# Altium PCB PCB1 - kopia.PcbDoc
Units mm, origin at the board's own origin, x right, y up, seen from the top; angles counter-clockwise.
Board outline 99.6 x 99.6 mm, 4 copper layers (Top Layer, Int1 (GND), Int2 (PWR), Bottom Layer), stack 1.369 mm thick; 74 components, 60 nets, 286 pads, 140 vias.
Unrouted connection lines stored in the file: 52.
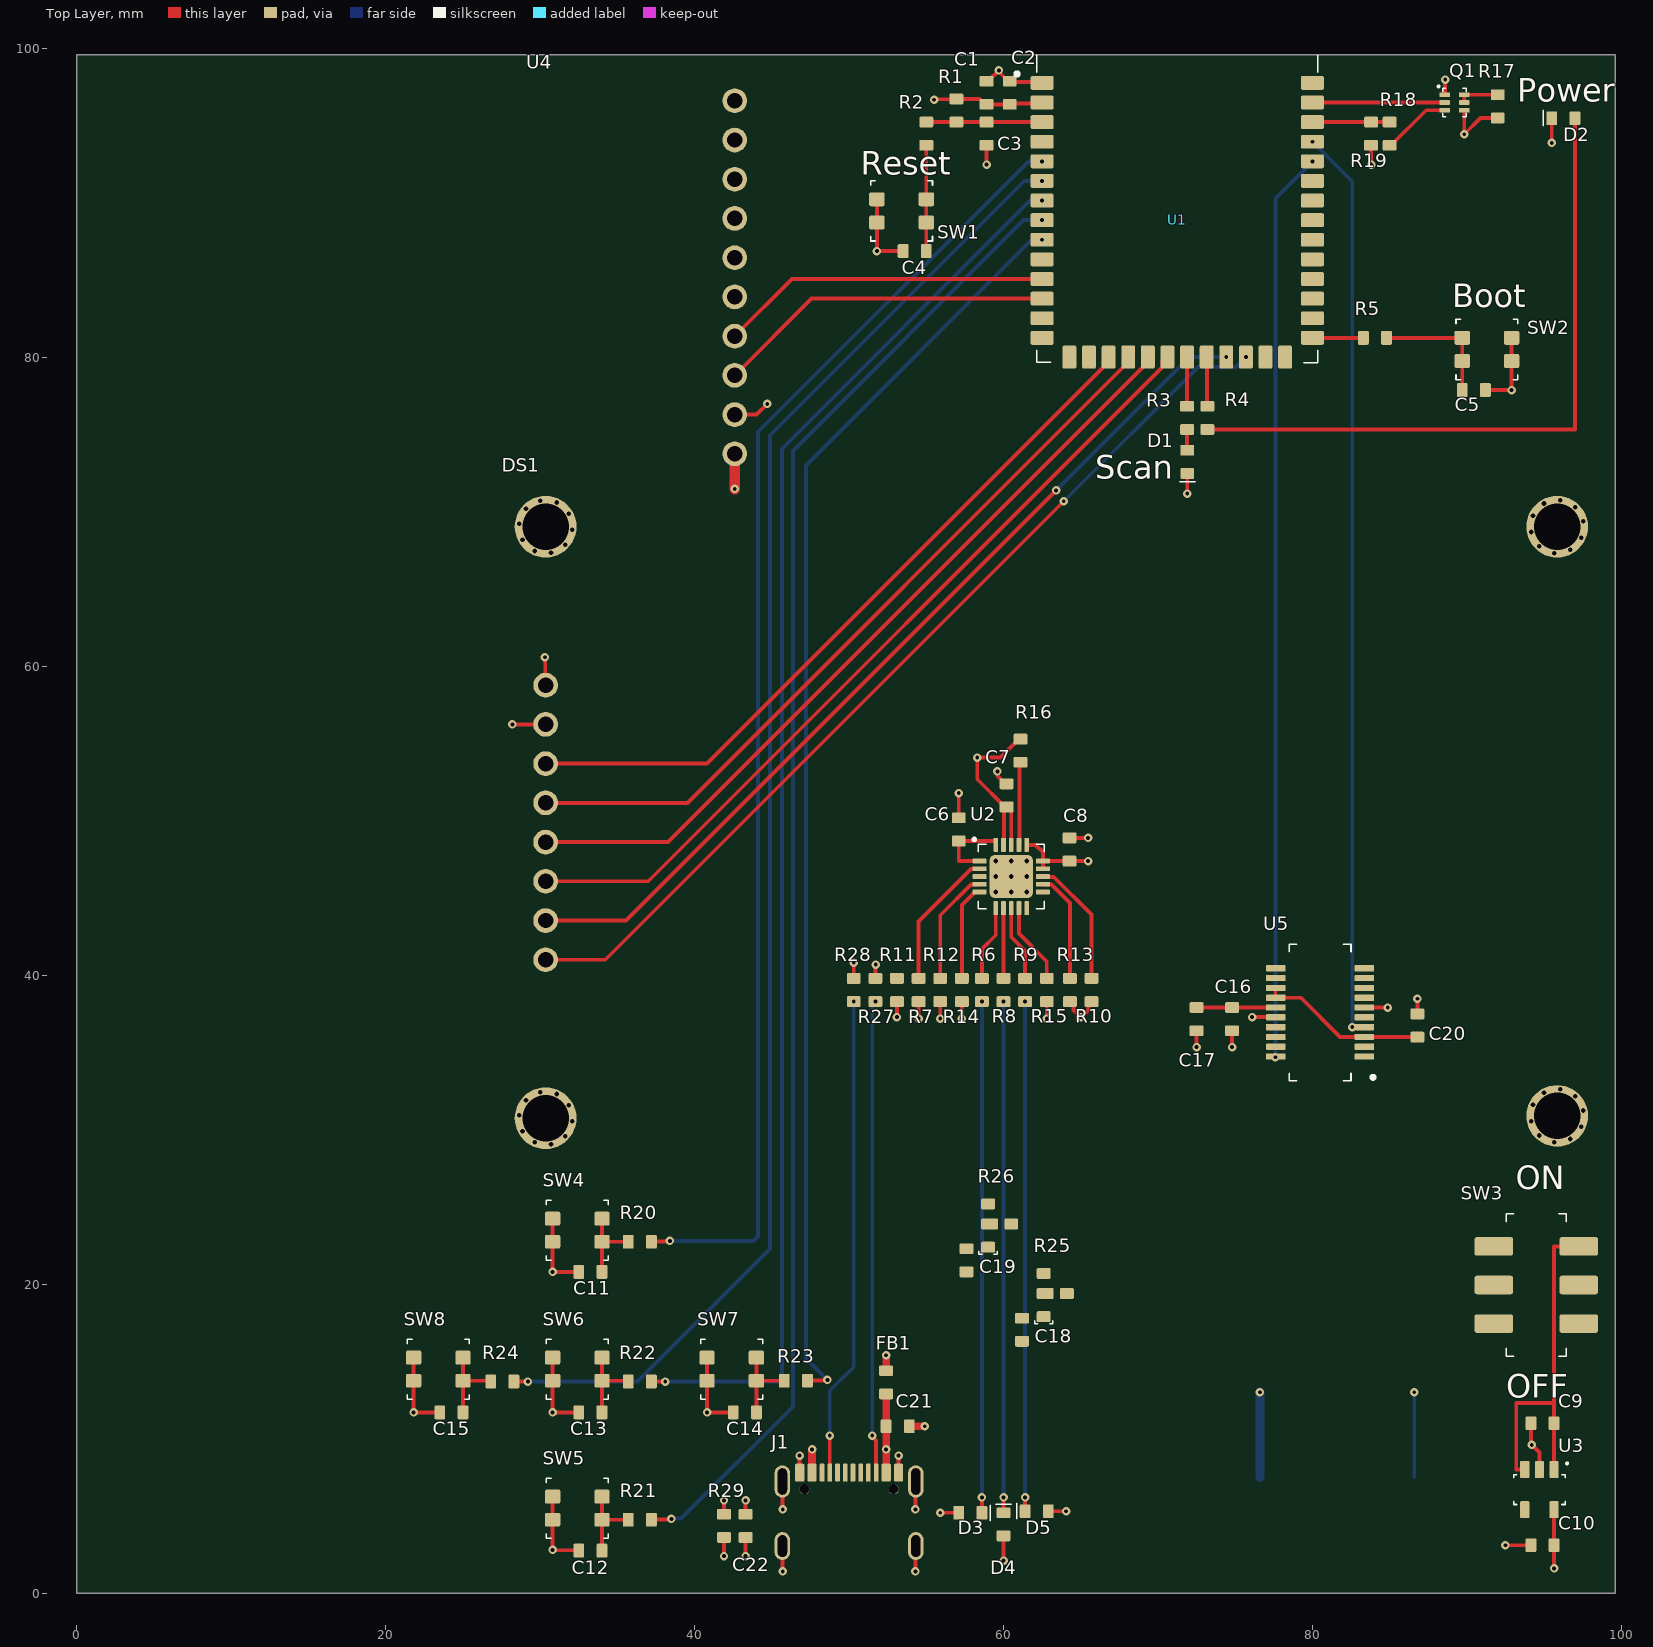
[diagram p0: Top Layer view]
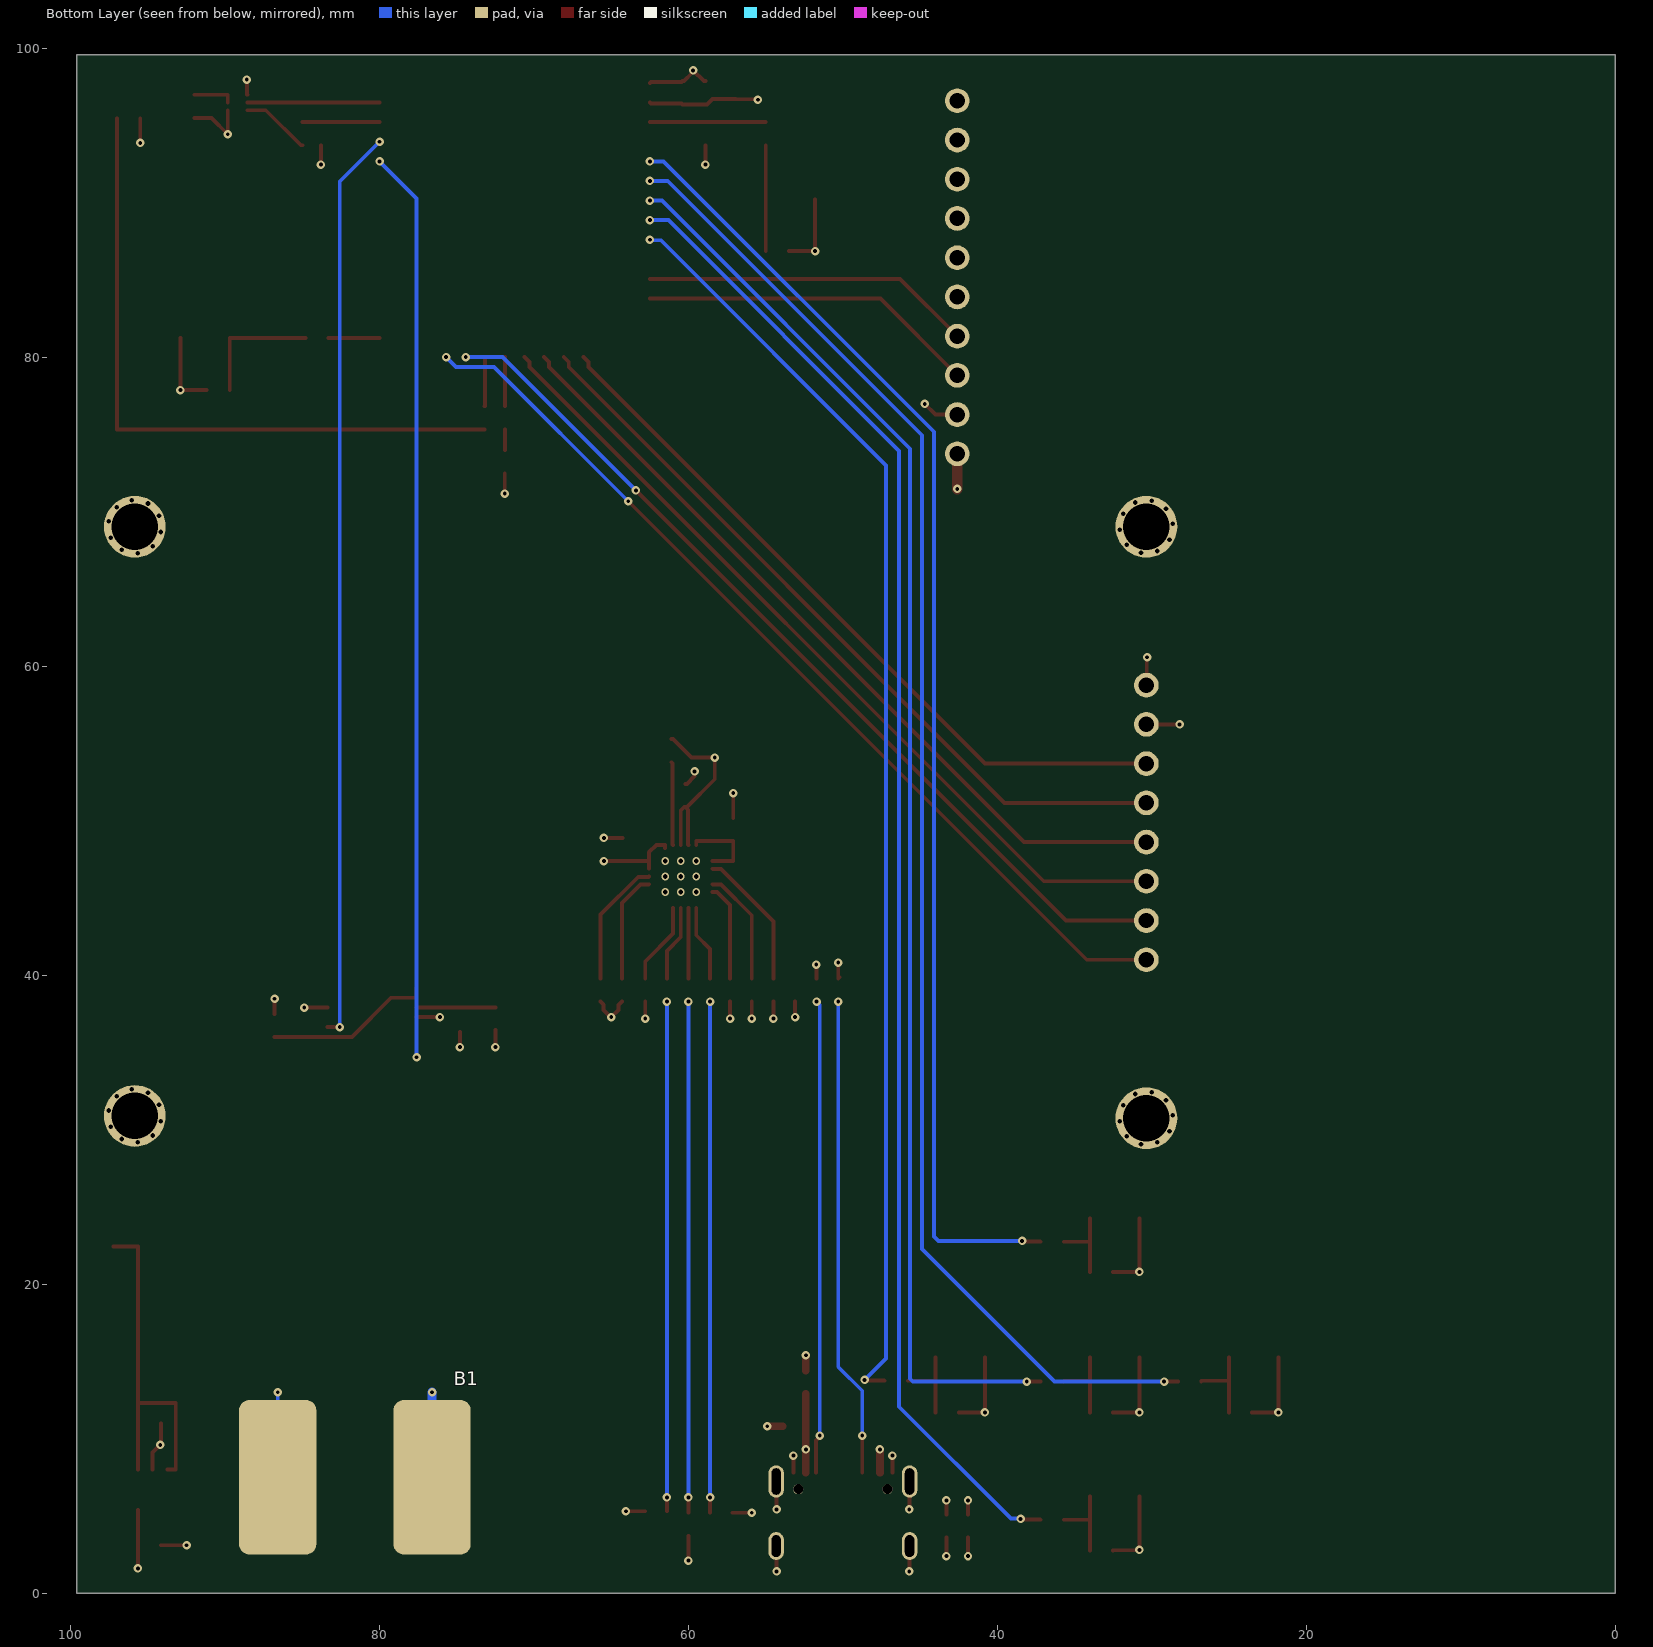
[diagram p1: Bottom Layer view, seen from below]
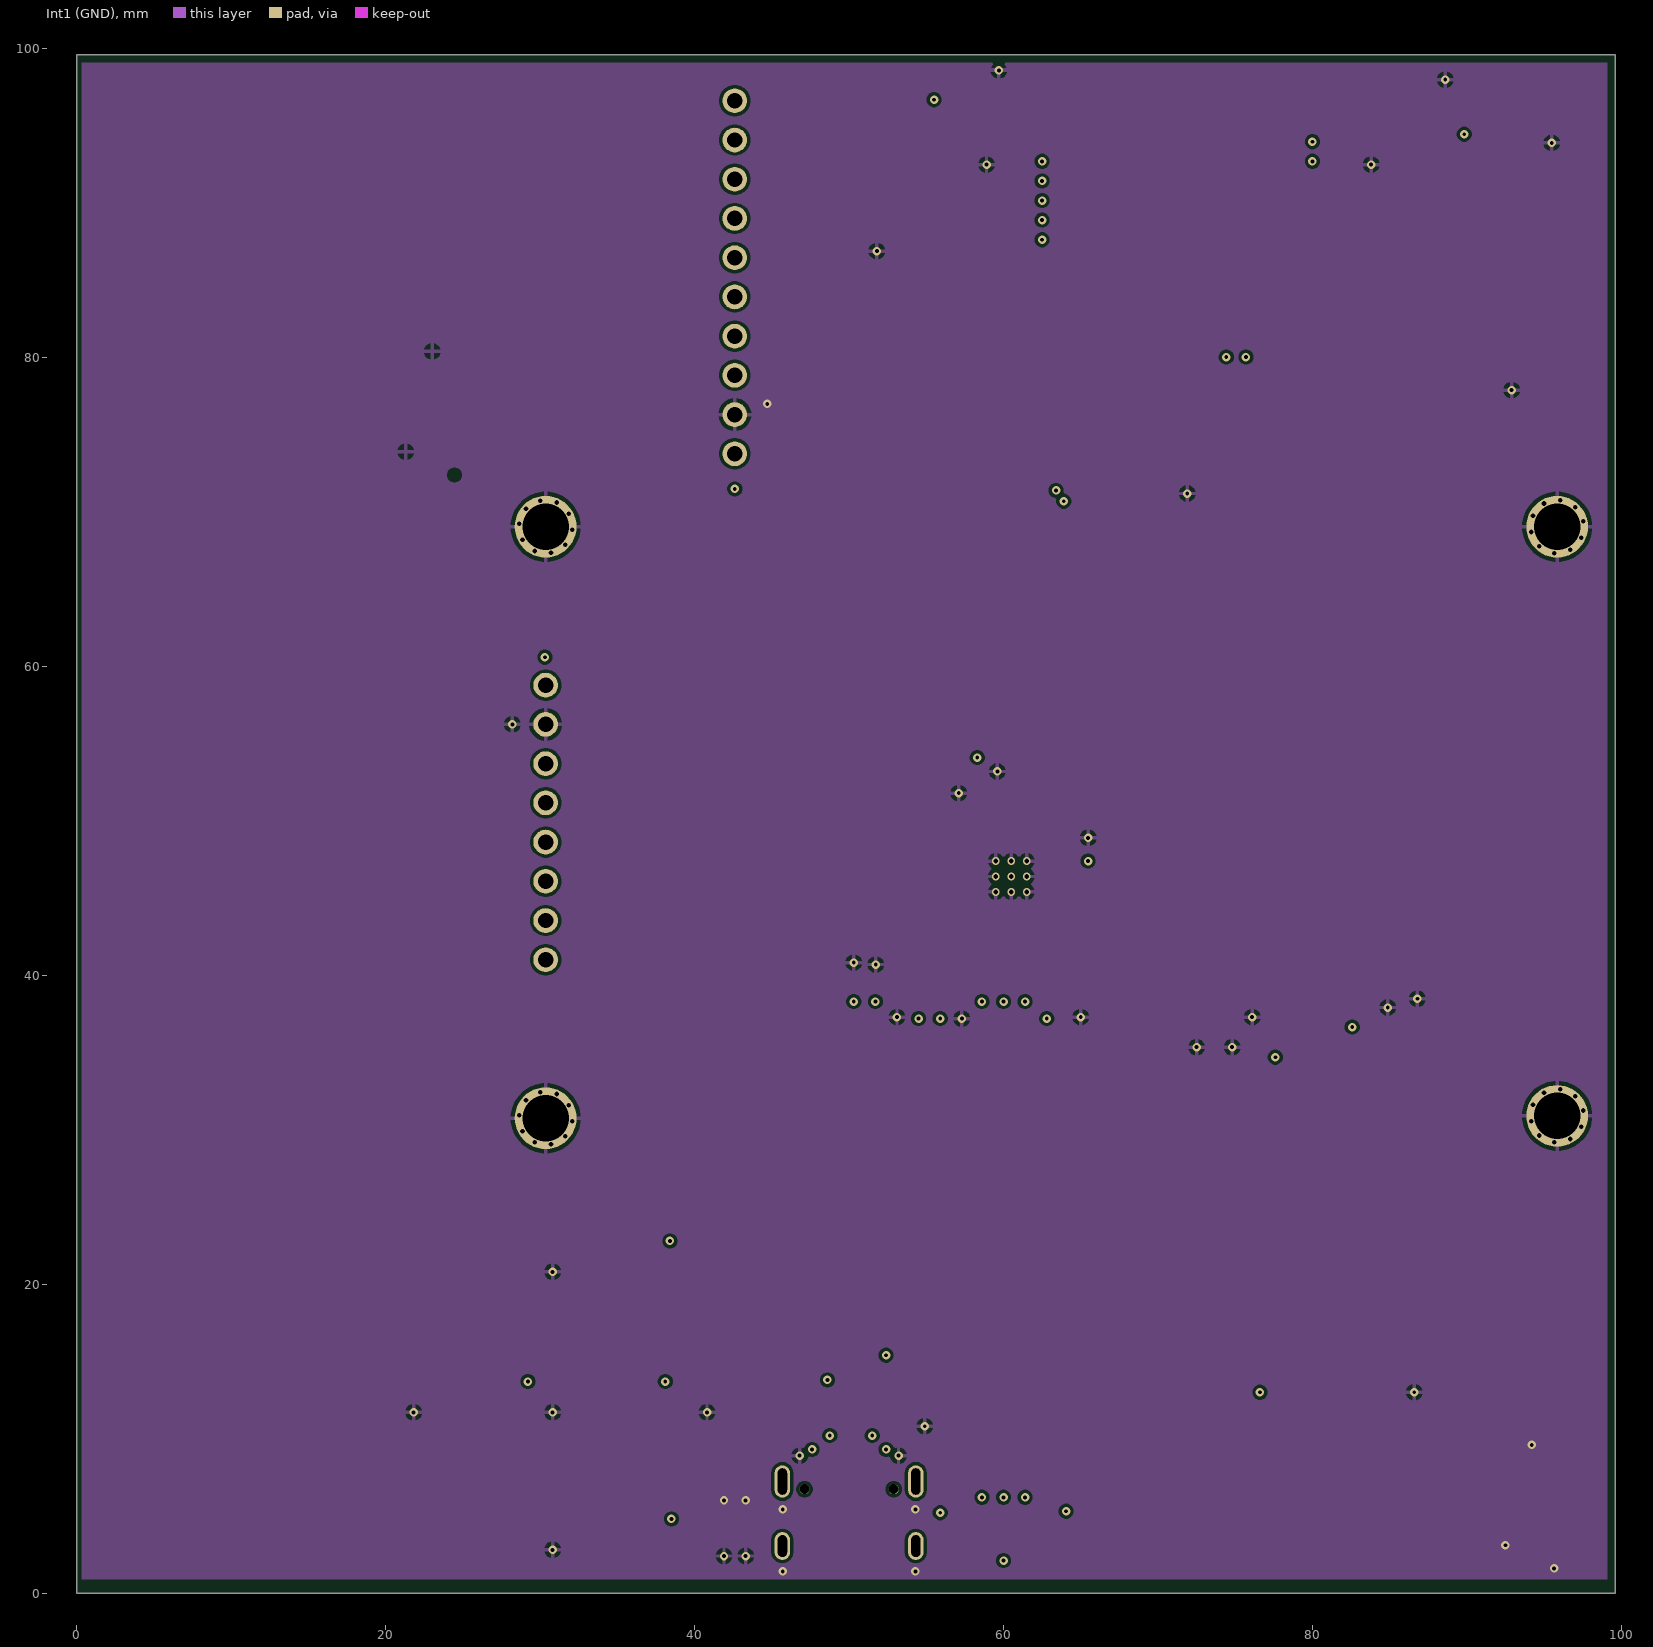
[diagram p2: Int1 (GND)]
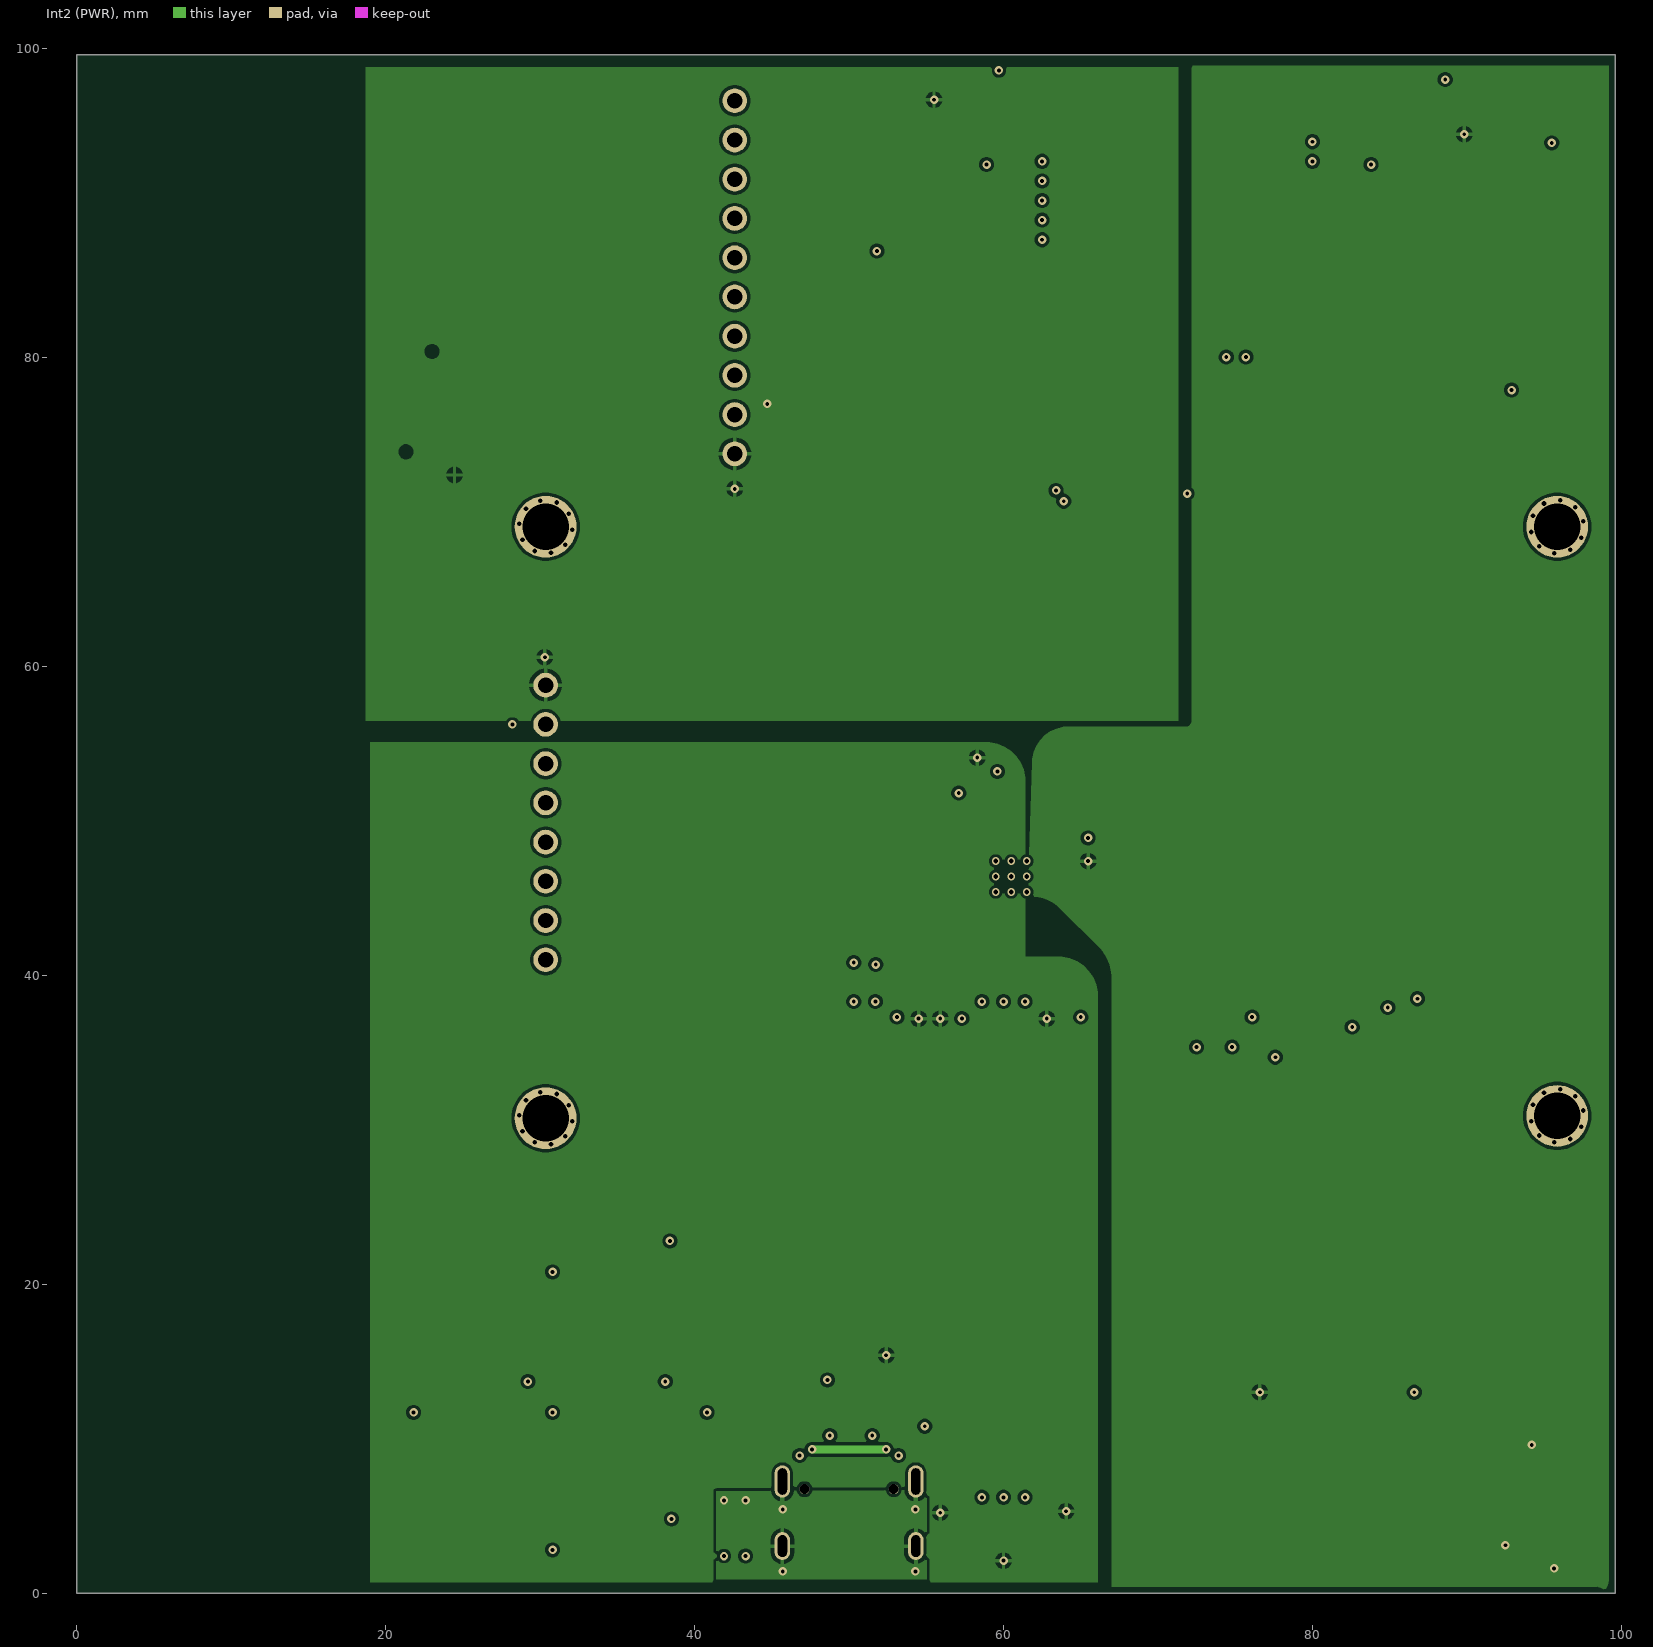
[diagram p3: Int2 (PWR)]
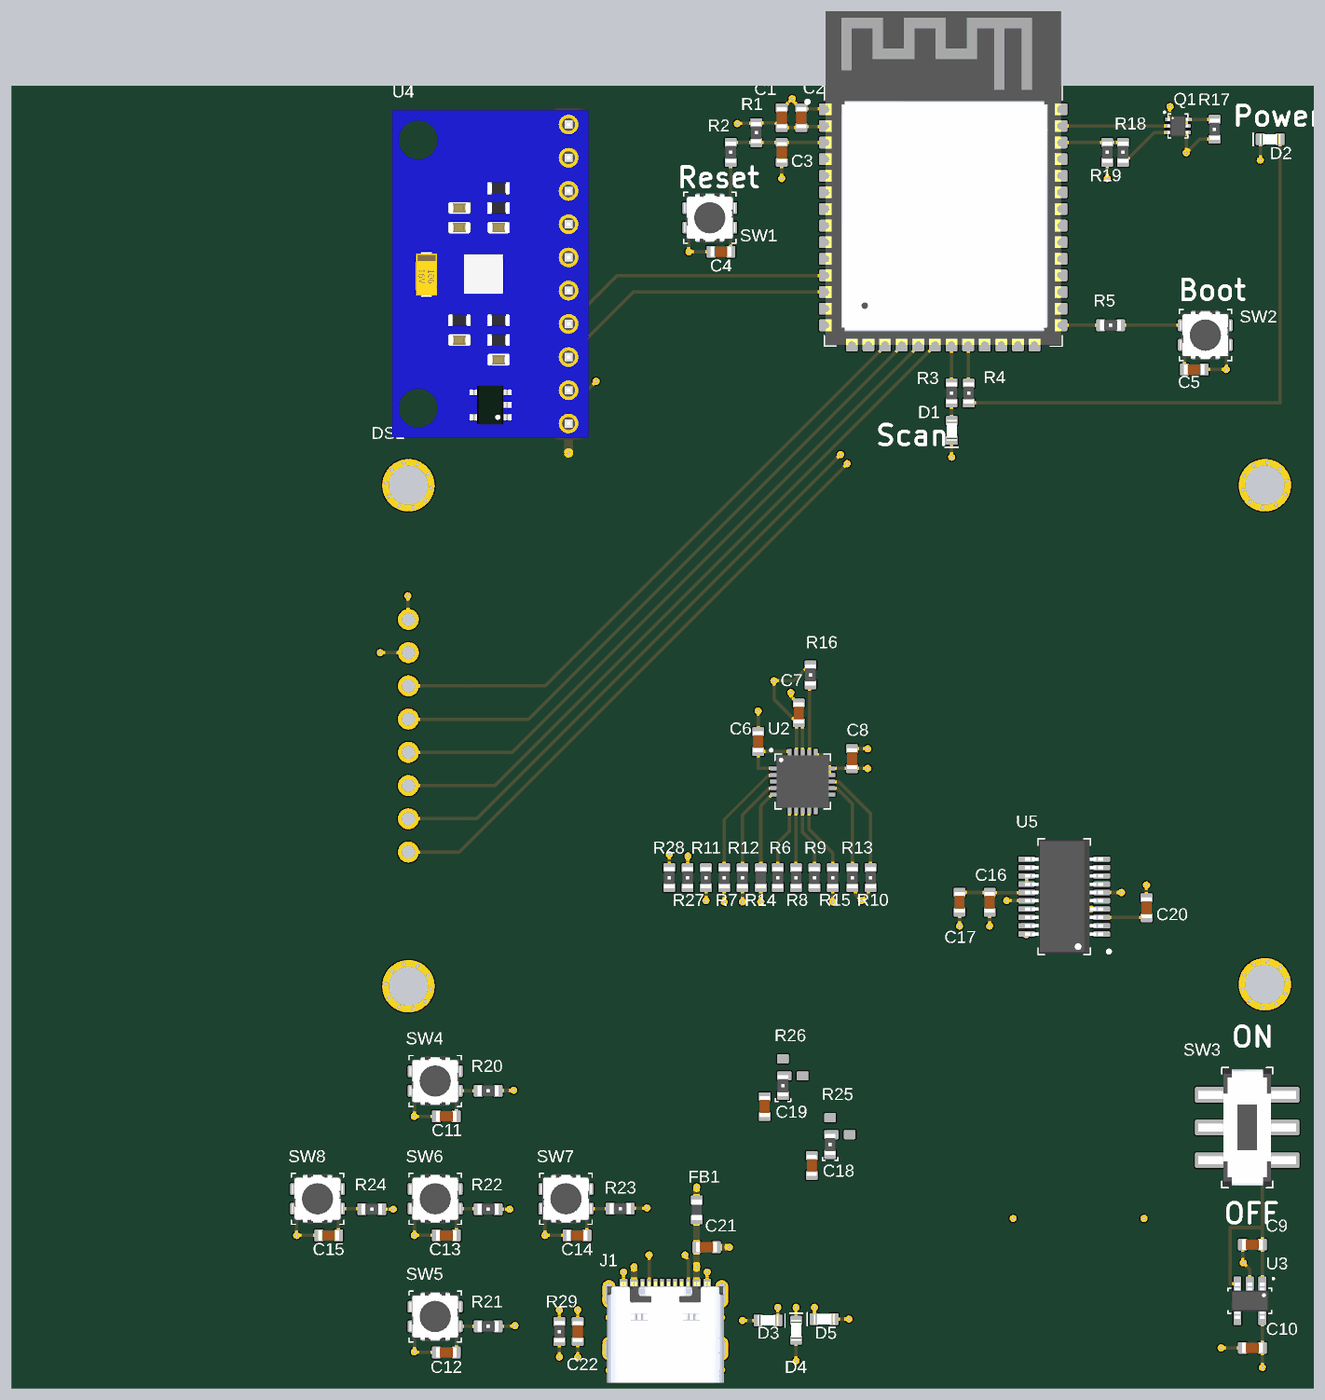
[diagram p4: 3D render of the assembled board from above, using the file's embedded part models]

## Layer stack, top to bottom
Top Solder: solder mask 0.0254, SM-001, Dk 4
Top Layer: signal copper 0.035
Dielectric 1: prepreg 0.1295, PP-017, Dk 4.3
Dielectric 2: prepreg 0.1295, PP-017, Dk 4.3
Int1 (GND): signal copper 0.035
Dielectric 3: core 0.7112, Core-039, Dk 4.8
Int2 (PWR): signal copper 0.035
Dielectric 4: prepreg 0.1295, PP-017, Dk 4.3
Dielectric 5: prepreg 0.1295, PP-017, Dk 4.3
Bottom Layer: signal copper 0.035
Bottom Solder: solder mask 0.0254, SM-001, Dk 4

## Board outline
0,0 99.6,0 99.6,99.6 0,99.6

## Design rules (kind name [scope] priority, off if disabled: settings)
Clearance [All] p1: gap=0.2 ignorepadtopadclearanceinfootprint=FALSE
DiffPairsRouting [All] p1: maxlimit=0.254 minlimit=0.254 mostfreqgap=0.254 toplayer_minwidth=0.381 toplayer_maxwidth=0.381 toplayer_prefwidth=0.381 midlayer1_minwidth=0.381 midlayer1_maxwidth=0.381 midlayer1_prefwidth=0.381 midlayer2_minwidth=0.381 midlayer2_maxwidth=0.381 midlayer2_prefwidth=0.381 bottomlayer_minwidth=0.381 bottomlayer_maxwidth=0.381 bottomlayer_prefwidth=0.381 maxuncoupledlength=12.7
PolygonConnect [All] p1: connectstyle=Relief reliefconductorwidth=0.254 reliefentries=4 polygonreliefangle="90 Angle" airgapwidth=0.254
RoutingVias [All] p1: holewidth=0.25 width=0.55 viastyle="Through Hole" minholewidth=0.25 minwidth=0.55 maxholewidth=0.25 maxwidth=0.55
SolderMaskExpansion [All] p1: expansion=0.102 istentingtop=FALSE
Width [All] p1: maxlimit=0.25 minlimit=0.25 preferedwidth=0.25
29 further rules are at their usual default settings.

## Classes and differential pairs
component class Power: B1 C6 C7 C8 C9 C10 D3 D4 D5 Q1 R6 R7 R8 R9 R10 R11 R12 R13 R14 R15 R16 R17 R18 R19 SW3 U2 U3
component class MCU: C1 C2 C3 C4 C5 D1 D2 R1 R2 R3 R4 R5 SW1 SW2 U1
component class COM: C16 C17 C18 C19 C20 C21 C22 FB1 J1 R25 R26 R27 R28 R29 U5
component class Peripherals: C11 C12 C13 C14 C15 DS1 R20 R21 R22 R23 R24 SW4 SW5 SW6 SW7 SW8 U4
differential pair D: +D_p -D_n

## Components (designator, comment, footprint, x,y, rotation, side; value= is the part's Value field where it differs from the comment)
B1 "1200mAh" battery 81.6,7.5 r0 bottom
C1 "22 μF" "Capacitor 0603" 58.9,97.15 r270 top
C2 "0.1 μF" "Capacitor 0603" 60.4,97.15 r270 top
C3 "1 μF" "Capacitor 0603" 58.9,94.5 r90 top
C4 "0.1 μF" "Capacitor 0603" 54.25,86.9 r0 top
C5 "0.1 μF" "Capacitor 0603" 90.45,77.9 r0 top
C6 "4.7 μF" "Capacitor 0603" 57.1,49.45 r270 top
C7 "10 μF" "Capacitor 0603" 60.2,51.65 r270 top
C8 "4.7 μF" "Capacitor 0603" 64.275,48.15 r90 top
C9 "4.7 μF" "Capacitor 0603" 94.9,11 r0 top
C10 "4.7 μF" "Capacitor 0603" 94.9,3.1 r180 top
C11 "0.1 μF" "Capacitor 0603" 33.25,20.8 r0 top
C12 "0.1 μF" "Capacitor 0603" 33.25,2.75 r0 top
C13 "0.1 μF" "Capacitor 0603" 33.25,11.7 r0 top
C14 "0.1 μF" "Capacitor 0603" 43.25,11.7 r0 top
C15 "0.1 μF" "Capacitor 0603" 24.25,11.7 r0 top
C16 "0.1 μF" "Capacitor 0603" 74.8,37.167 r90 top
C17 "4.7 μF" "Capacitor 0603" 72.5,37.167 r90 top
C18 "47 pF" "Capacitor 0603" 61.2,17.05 r90 top
C19 "47 pF" "Capacitor 0603" 57.6,21.55 r90 top
C20 "0.1 μF" "Capacitor 0603" 86.8,36.75 r270 top
C21 "10 nF" "Capacitor 0603" 53.15,10.8 r180 top
C22 "4.7 μF" "Capacitor 0603" 43.3,4.35 r90 top
D1 "Blue" "LED 0603" 71.9,73.25 r270 top
D2 "Green" "LED 0603" 96.25,95.5 r180 top
D3 "Green" "LED 0603" 57.85,5.2 r0 top
D4 "Blue" "LED 0603" 60,4.45 r90 top
D5 "Red" "LED 0603" 62.15,5.3 r180 top
DS1 "FT231XS-R" SCREEN 63.1,49.9 r0 top
FB1 "0.6kΩ" "Ferrite Bead 0603" 52.4,13.65 r90 top
J1 "USB4105-GF-A" USB4105-GF-A 50,7.8 r0 top
Q1 "DMC2400UV-7" "MOSFET N/P-CH" 89.2,96.52 r270 top
R1 "10kΩ" "Resistor 0603" 56.95,96 r270 top
R2 "0 Ω" "Resistor 0603" 55,94.5 r90 top
R3 "50 Ω" "Resistor 0603" 71.885,76.1 r90 top
R4 "50 Ω" "Resistor 0603" 73.2,76.1 r270 top
R5 "0 Ω" "Resistor 0603" 84.05,81.28 r0 top
R6 "0.47kΩ" "Resistor 0603" 58.6,39.05 r90 top
R7 "330kΩ" "Resistor 0603" 54.5,39.05 r270 top
R8 "0.47kΩ" "Resistor 0603" 60,39.05 r90 top
R9 "0.47kΩ" "Resistor 0603" 61.4,39.05 r90 top
R10 "4.7kΩ" "Resistor 0603" 65.7,39.05 r270 top
R11 "110kΩ" "Resistor 0603" 53.1,39.05 r90 top
R12 "4.7kΩ" "Resistor 0603" 55.9,39.05 r90 top
R13 "100kΩ" "Resistor 0603" 64.3,39.05 r270 top
R14 "10kΩ" "Thermistor 0603" 57.3,39.05 r270 top
R15 "4.7kΩ" "Resistor 0603" 62.8,39.05 r90 top
R16 "4.7kΩ" "Resistor 0603" 61.1,54.55 r270 top
R17 "110kΩ" "Resistor 0603" 92,96.27 r90 top
R18 "30kΩ" "Resistor 0603" 85,94.5 r270 top
R19 "110kΩ" "Resistor 0603" 83.8,94.5 r90 top
R20 "0 Ω" "Resistor 0603" 36.45,22.75 r0 top
R21 "0 Ω" "Resistor 0603" 36.45,4.75 r0 top
R22 "0 Ω" "Resistor 0603" 36.45,13.7 r0 top
R23 "0 Ω" "Resistor 0603" 46.55,13.75 r0 top
R24 "0 Ω" "Resistor 0603" 27.55,13.7 r0 top
R25 "27Ω" "Resistor bridge" 62.6,18.65 r90 top
R26 "27Ω" "Resistor bridge" 59,23.15 r90 top
R27 "5.1kΩ" "Resistor 0603" 51.7,39.05 r270 top
R28 "5.1kΩ" "Resistor 0603" 50.3,39.05 r270 top
R29 "100kΩ" "Resistor 0603" 41.9,4.35 r90 top
SW1 "R-667843" R-667843 53.4,89.5 r0 top
SW2 "R-667843" R-667843 91.3,80.53 r0 top
SW3 "JS202011SCQN" JS202011SCQN 94.5,19.95 r270 top
SW4 "R-667843" R-667843 32.4,23.5 r0 top
SW5 "R-667843" R-667843 32.4,5.5 r0 top
SW6 "R-667843" R-667843 32.4,14.5 r0 top
SW7 "R-667843" R-667843 42.4,14.5 r0 top
SW8 "R-667843" R-667843 23.4,14.5 r0 top
U1 "ESP32-S3-WROOM-1-N16" ESP32-C3-WROOM-1 71.25,97.79 r0 top
U2 "MCP73871T-2CCI/ML" MCP73871 60.5,46.4 r0 top
U3 "TLV75533PDBVR" TLV75533PDBVR 94.7,6.7 r270 top
U4 "YUMILI1otydzvg2c" GY-9250 42.6,85.2 r180 top
U5 "FT231XS-R" FT231XS-R 80.5,37.6 r90 top

## Footprints (in the part's own frame and the unit in brackets; to place one, negate y for a bottom-side part, rotate by r counter-clockwise, add the part's x,y. Pads: shape width x height; smd on the part's side, far side on the other; paste and mask are expansions set on the pad)
battery [mm]
  rrect25% 5x10 smd: +(-5,0) -(5,0)
"Capacitor 0603" [mm] "Capacitor0603"
  rrect25% 0.7x0.9 smd: A(-0.75,0) B(0.75,0)
  body extent -0.8,-0.4 0.8,0.4, height 0.9
ESP32-C3-WROOM-1 [mm] "MCU"
  rrect25% 1.5x0.9 smd: 1(-8.75,0) 2(-8.75,-1.27) 3(-8.75,-2.54) 4(-8.75,-3.81) 5(-8.75,-5.08) 6(-8.75,-6.35) 7(-8.75,-7.62) 8(-8.75,-8.89) 9(-8.75,-10.16) 10(-8.75,-11.43) 11(-8.75,-12.7) 12(-8.75,-13.97) 13(-8.75,-15.24) 14(-8.75,-16.51) 27(8.75,-16.51) 28(8.75,-15.24) 29(8.75,-13.97) 30(8.75,-12.7) 31(8.75,-11.43) 32(8.75,-10.16) 33(8.75,-8.89) 34(8.75,-7.62) 35(8.75,-6.35) 36(8.75,-5.08) 37(8.75,-3.81) 38(8.75,-2.54) 39(8.75,-1.27) 40(8.75,0)
  rrect25% 0.9x1.5 smd: 15(-6.985,-17.757) 16(-5.715,-17.757) 17(-4.445,-17.757) 18(-3.175,-17.757) 19(-1.905,-17.757) 20(-0.635,-17.757) 21(0.635,-17.757) 22(1.905,-17.757) 23(3.175,-17.757) 24(4.445,-17.757) 25(5.715,-17.757) 26(6.985,-17.757)
  silkscreen extent -10.49,-18.12 9.1,1.78, body extent -9,-18.01 9,7.49, height 3.25
"Ferrite Bead 0603" [mm] "Ferrite Bead 0603"
  rrect25% 0.7x0.9 smd: A(-0.75,0) B(0.75,0)
  body extent -0.8,-0.4 0.8,0.4, height 0.95
FT231XS-R [mil] "USB to UART Bridge"
  rrect25% 16x50 smd: 1(-112.5,-113) 2(-87.5,-113) 3(-62.5,-113) 4(-37.5,-113) 5(-12.5,-113) 6(12.5,-113) 7(37.5,-113) 8(62.5,-113) 9(87.5,-113) 10(112.5,-113) 11(112.5,113) 12(87.5,113) 13(62.5,113) 14(37.5,113) 15(12.5,113) 16(-12.5,113) 17(-37.5,113) 18(-62.5,113) 19(-87.5,113) 20(-112.5,113)
  silkscreen extent -174,-139 174,79, body extent -170,-118 170,118, height 69
GY-9250 [mm] "IMU"
  round 1.6 hole 1: 1(0,11.43) 2(0,8.89) 3(0,6.35) 4(0,3.81) 5(0,1.27) 6(0,-1.27) 7(0,-3.81) 8(0,-6.35) 9(0,-8.89) 10(0,-11.43)
  body extent -1.5,-12.7 13.5,12.7, height 6.1
JS202011SCQN [mm] "SWITCH SLIDE DPDT 300MA 6V"
  rrect25% 1.2x2.5 smd: 1(-2.5,-2.75) 2(0,-2.75) 3(2.5,-2.75) 4(-2.5,2.75) 5(0,2.75) 6(2.5,2.75)
  silkscreen extent -4.6,-1.95 4.6,1.95, body extent -4.5,-3.75 4.5,3.75, height 5.51
"LED 0603" [mm] "Resistor 0603"
  rrect25% 0.7x0.9 smd: A(-0.75,0) B(0.75,0)
  silkscreen extent 1.3,-0.5 1.3,0.5, body extent -0.8,-0.4 0.8,0.4, height 0.35
MCP73871 [mm]
  rrect25% 0.9x0.3 smd: 1(-2.05,1) 2(-2.05,0.5) 3(-2.05,0) 4(-2.05,-0.5) 5(-2.05,-1) 11(2.05,-1) 12(2.05,-0.5) 13(2.05,0) 14(2.05,0.5) 15(2.05,1)
  rrect25% 0.3x0.9 smd: 6(-1,-2.05) 7(-0.5,-2.05) 8(0,-2.05) 9(0.5,-2.05) 10(1,-2.05) 16(1,2.05) 17(0.5,2.05) 18(0,2.05) 19(-0.5,2.05) 20(-1,2.05)
  rrect25% 2.8x2.8 smd: 21(0,0)
  silkscreen extent -2.45,-2.1 2.12,2.45, body extent -2,-2 2,2, height 1
"MOSFET N/P-CH" [mm] "MOSFET N/P-CH"
  rrect25% 0.3x0.67 smd: 1(-0.5,-0.635) 2(0,-0.635) 3(0.5,-0.635) 4(-0.5,0.635) 5(0,0.635) 6(0.5,0.635)
  silkscreen extent -1.05,-1.03 0.91,0.76, body extent -0.8,-0.8 0.8,0.8, height 0.6
R-667843 [mm] "SWITCH TACTILE SPST-NO 0.05A 12V"
  rrect25% 1x0.9 smd: A(-1.6,-0.75) A(-1.6,0.75) B(1.6,-0.75) B(1.6,0.75)
  silkscreen extent -2,-1.95 2,1.95, body extent -1.95,-1.9 1.95,1.9, height 1.5
"Resistor 0603" [mm] "Resistor 0603"
  rrect25% 0.7x0.9 smd: A(-0.75,0) B(0.75,0)
  body extent -0.8,-0.4 0.8,0.4, height 0.55
"Resistor bridge" [mm] "Resistor 0603"
  rrect25% 0.7x0.9 smd: A(-0.75,0) B(0.75,-1.5) B(2.05,0)
  rrect25% 0.7x1.1 smd: B(0.75,-0.1)
  silkscreen extent -1.21,-0.59 -1,0.59, body extent -0.8,-0.4 0.8,0.4, height 0.55
SCREEN [mm]
  round 1.6 hole 1: 1(-32.75,8.89) 2(-32.75,6.35) 3(-32.75,3.81) 4(-32.75,1.27) 5(-32.75,-1.27) 6(-32.75,-3.81) 7(-32.75,-6.35) 8(-32.75,-8.89)
  round 4 hole 3: 2(-32.75,-19.15) 2(-32.75,19.15) 2(32.75,-19) 2(32.75,19.15)
  body extent -35.25,-21.65 35.25,21.65, height 7
"Thermistor 0603" [mm] "Thermistor 0603"
  rrect25% 0.7x0.9 smd: A(-0.75,0) B(0.75,0)
  body extent -0.8,-0.4 0.8,0.4, height 0.9
TLV75533PDBVR [mm] "IC REG LINEAR 3.3V 500MA SOT23-5"
  rrect25% 1.1x0.6 smd: 1(-1.3,0.95) 2(-1.3,0) 3(-1.3,-0.95) 4(1.3,-0.95) 5(1.3,0.95)
  silkscreen extent -1.7,-1.67 0.96,1.8, body extent -1.4,-1.45 1.4,1.45, height 1.45
USB4105-GF-A [mm] "CONN RCPT TYPE C 6P SMD RA"
  round 0.65 hole 0.65 unplated: 36(-2.89,-1.075) 36(2.89,-1.075)
  rrect25% 0.6x1.15 smd: A1(-3.2,0) A4(-2.4,0) B1(3.2,0) B4(2.4,0)
  rrect25% 0.3x1.15 smd: A5(-1.25,0) A6(-0.25,0) A7(0.25,0) A8(1.25,0) B5(1.75,0) B6(0.75,0) B7(-0.75,0) B8(-1.75,0)
  oval 1x1.8 hole 0.6 slot 1.4 at 90 deg: SHELL(-4.32,-4.755) SHELL(4.32,-4.755)
  oval 1x2.1 hole 0.6 slot 1.7 at 90 deg: SHELL(-4.32,-0.575) SHELL(4.32,-0.575)
  body extent -4.47,-7.35 4.47,0.36, height 3.31

## Part data
B1: library part Battery, "Lipobatteri - 103040 - 1.200 mAh", Manufacturer=batterikungen, Manufacturer Part Number=103040, Supplier Part Number 1=827-016, Supplier 1=Batterikungen
C1: library part "22 μF 0603", "Capacitor 22 μF", Manufacturer="Murata Electronics", Manufacturer Part Number=GRM188R60G226MEA0D, Supplier Part Number 1=490-5526-1-ND, Supplier 1=Digikey
C2 C4 C5 C11 C12 C13 C14 C15 C16 C20: library part "0.1 μF 0603", "Capacitor 0.1 μF", Manufacturer="Samsung Electro-Mechanics", Manufacturer Part Number=CL10B104KB8NNWC, Supplier Part Number 1=1276-1935-1-ND, Supplier 1=Digikey
C3: library part "1 μF 0603", "Capacitor 1 μF", Manufacturer="Samsung Electro-Mechanics", Manufacturer Part Number=CL10A105KA8NNNC, Supplier Part Number 1=1276-1102-1-ND, Supplier 1=Digikey
C6 C8 C9 C10 C17 C22: library part "4,7 μF 0603", "Capacitor 4.7 μF", Manufacturer="Samsung Electro-Mechanics", Manufacturer Part Number=CL10A475KP8NNNC, Supplier Part Number 1=1276-1044-1-ND, Supplier 1=Digikey
C7: library part "10 μF 0603", "Capacitor 10 μF", Manufacturer="Samsung Electro-Mechanics", Manufacturer Part Number=CL10A106MQ8NNNC, Supplier Part Number 1=1276-1119-1-ND, Supplier 1=Digikey
C18 C19: library part "47 pF 0603", "Capacitor 47 pF", Manufacturer="Walsin Technology Corporation", Manufacturer Part Number=0603N470J500CT, Supplier Part Number 1=1292-1528-1-ND, Supplier 1=Digikey
C21: library part "10 nF 0603", "Capacitor 10 nF", Manufacturer="Samsung Electro-Mechanics", Manufacturer Part Number=CL10B103KB8NNNC, Supplier Part Number 1=1276-1009-1-ND, Supplier 1=Digikey
D1 D4: library part D.Blue, "Diode Blue", Manufacturer="Lite-On Inc.", Manufacturer Part Number=LTST-C193TBKT-5A, Supplier Part Number 1=160-1827-1-ND, Supplier 1=Digikey
D2 D3: library part D.Green, "Diode Green", Manufacturer="Lumex Opto/Components Inc.", Manufacturer Part Number=SML-LXFT0603GC-TR, Supplier Part Number 1=67-SML-LXFT0603GC-TRCT-ND, Supplier 1=Digikey
D5: library part D.Red, "Diode Red", Manufacturer="Lite-On Inc.", Manufacturer Part Number=LTST-C190KRKT, Supplier Part Number 1=160-1436-1-ND, Supplier 1=Digikey
DS1: library part LCD-screen, "240×320, General 2.4inch LCD Display Module, 65K RGB", Manufacturer="FTDI, Future Technology Devices International Ltd", Supplier Part Number 1=768-1129-1-ND, Manufacturer Part Number=FT231XS-R, Supplier 1=Waveshare
FB1: library part "FB 0.6 kΩ 0603", "Ferrite Bead 600 Ω", Manufacturer="Murata Electronics", Manufacturer Part Number=BLM18AG601SN1D, Supplier Part Number 1=490-1014-1-ND, Supplier 1=Digikey
J1: "CONN RCPT TYPE C 6P SMD RA", Manufacturer=GCT, Supplier Part Number 1=2073-USB4105-GF-ACT-ND, Manufacturer Part Number=USB4105-GF-A, Supplier 1=Digikey
Q1: "MOSFET N/P-CH 20V SOT563", Manufacturer="Diodes Incorporated", Supplier Part Number 1=DMC2400UV-7DICT-ND, Manufacturer Part Number=DMC2400UV-7, Supplier 1=Digikey
R1: library part "10 kΩ 0603", "Resistor 10000 Ω", Manufacturer="Stackpole Electronics Inc", Manufacturer Part Number=RMCF0603FT10K0, Supplier Part Number 1=RMCF0603FT10K0CT-ND, Supplier 1=Digikey
R2 R5 R20 R21 R22 R23 R24: library part "0 Ω 0603", "Resistor 0 Ω", Manufacturer="Stackpole Electronics Inc", Manufacturer Part Number=RMCF0603ZT0R00, Supplier Part Number 1=RMCF0603ZT0R00CT-ND, Supplier 1=Digikey
R3 R4: library part "0.05 kΩ 0603", "Resistor 50 Ω", Manufacturer="Vishay Dale", Manufacturer Part Number=CRCW060350R0FKEA, Supplier Part Number 1=541-3318-1-ND, Supplier 1=Digikey
R6 R8 R9: library part "0.47 kΩ 0603", "Resistor 470 Ω", Manufacturer="Stackpole Electronics Inc", Manufacturer Part Number=RMCF0603FT470R, Supplier Part Number 1=RMCF0603FT470RCT-ND, Supplier 1=Digikey
R7: library part "330 kΩ 0603", "Resistor 330000 Ω", Manufacturer=YAGEO, Manufacturer Part Number=RC0603JR-07330KL, Supplier Part Number 1=311-330KGRCT-ND, Supplier 1=Digikey
R10 R12 R15 R16: library part "4.7 kΩ 0603", "Resistor 4700 Ω", Manufacturer="Stackpole Electronics Inc", Manufacturer Part Number=RMCF0603FT4K70, Supplier Part Number 1=RMCF0603FT4K70CT-ND, Supplier 1=Digikey
R11 R17 R19: library part "110 kΩ 0603", "Resistor 110000 Ω", Manufacturer="Stackpole Electronics Inc", Manufacturer Part Number=RMCF0603FT110K, Supplier Part Number 1=RMCF0603FT110KCT-ND, Supplier 1=Digikey
R13 R29: library part "100 kΩ 0603", "Resistor 100000 Ω", Manufacturer="Stackpole Electronics Inc", Manufacturer Part Number=RMCF0603FT100K, Supplier Part Number 1=RMCF0603FT100KCT-ND, Supplier 1=Digikey
R14: library part "NTC 10 KΩ 0603", "Thermistor 10000 Ω", Manufacturer="Panasonic Electronic Components", Manufacturer Part Number=ERT-J1VR103J, Supplier Part Number 1=P10547CT-ND, Supplier 1=Digikey
R18: library part "30 kΩ 0603", "Resistor 30000 Ω", Manufacturer=YAGEO, Manufacturer Part Number=RC0603FR-0730KL, Supplier Part Number 1=311-30.0KHRCT-ND, Supplier 1=Digikey
R25 R26: library part "27 Ω 0603", "Resistor 27 Ω", Manufacturer="Stackpole Electronics Inc", Manufacturer Part Number=RMCF0603FT27R0, Supplier Part Number 1=RMCF0603FT27R0CT-ND, Supplier 1=Digikey
R27 R28: library part "5.1 kΩ 0603", "Resistor 5100 Ω", Manufacturer="Stackpole Electronics IncStackpole Electronics Inc", Manufacturer Part Number=RMCF0603FT5K10, Supplier Part Number 1=RMCF0603FT5K10CT-ND, Supplier 1=Digikey
SW1 SW2 SW4 SW5 SW6 SW7 SW8: "SWITCH TACTILE SPST-NO 0.05A 12V", Manufacturer="Mitsumi Electric Company Ltd", Supplier Part Number 1=2508-R-667843CT-ND, Manufacturer Part Number=R-667843, Supplier 1=Digikey
SW3: "SWITCH SLIDE DPDT 300MA 6V", Manufacturer=C&K, Supplier Part Number 1=401-2002-1-ND, Manufacturer Part Number=JS202011SCQN, Supplier 1=Digikey
U1: "RF TXRX MODULE BT PCB TRACE SMD", Manufacturer="Espressif Systems", Supplier Part Number 1=1965-ESP32-S3-WROOM-1-N16CT-ND, Manufacturer Part Number=ESP32-S3-WROOM-1-N16, Supplier 1=Digikey
U2: library part MCP73871, "IC BATT CHG LI-ION 1CELL 20QFN", Manufacturer="Microchip Technology", Supplier Part Number 1=MCP73871T-2CCI/MLDKR-ND, Manufacturer Part Number=MCP73871T-2CCI/ML, Supplier 1=Digikey
U3: "IC REG LINEAR 3.3V 500MA SOT23-5", Manufacturer="Texas Instruments", Supplier Part Number 1=296-50411-1-ND, Manufacturer Part Number=TLV75533PDBVR, Supplier 1=Digikey
U4: library part GY-9250, "YUMILI Gyroskopmodul MPU-9250 GY-9250 9-axel 16-bitars", Manufacturer=YUMILI, Supplier Part Number 1=B09XZQNQBV, Manufacturer Part Number=YUMILI1otydzvg2c, Supplier 1=Amazon
U5: library part FT231XS-R_1, "IC USB SERIAL FULL UART 20SSOP", Manufacturer="FTDI, Future Technology Devices International Ltd", Supplier Part Number 1=768-1129-1-ND, Manufacturer Part Number=FT231XS-R, Supplier 1=Digikey

## Via types
v1: diameter 0.55, hole 0.25, Top Layer to Bottom Layer, 86 vias
v2: diameter 0.4, hole 0.3, Top Layer to Bottom Layer, 44 vias
v3: diameter 0.5, hole 0.3, Top Layer to Bottom Layer, 9 vias
v4: diameter 0.55/0.55/0.55/0.55 (per signal layer), hole 0.25, Top Layer to Bottom Layer, 1 vias

## Nets (pads, with @x,y where several pads share a name; then routed paths per layer and width w, separated by ;. In a path a pad name is that pad's centre, name@x,y a point inside that pad or via, vN(x,y) a via of type N, cw(c..) or ccw(c..) an arc to the next point about the centre after c; other vN are vias at no path point)
+3V3: C1.B C2.B C10.A DS1.1 R1.A U1.2 U3.5 U4.1 | length 15.2
  Top Layer w0.25: v1(30.3,60.6) 30.325,60.575 30.325,58.815 DS1.1 ; v1(55.5,96.7) 55.525,96.725 56.925,96.725 R1.A 58.45,96.75 58.8,96.4 C1.B C2.B 60.46,96.46 62.44,96.46 U1.2 ; U3.5 C10.A v1(95.65,1.6) v1@95.7,1.6
  Top Layer w0.7: v1(42.6,71.5) U4.1
D_n: C18.B J1.A7 J1.B7 R25.A
D_p: C19.B J1.A6 J1.B6 R26.A
GND: B1.- C1.A C2.A C3.A C4.A C5.B C6.A C7.A C8.B C9.A C10.B C11.A C12.A C13.A C14.A C15.A C16.A C17.A C18.A C19.A C20.A C21.A C22.A D1.B D2.B DS1.2 J1.A1 J1.B1 Q1.1 R10.B R11.A R13.B R14.B R19.A R27.A R28.A R29.A SW1.A SW2.B SW4.A SW5.A SW6.A SW7.A SW8.A U1.1 U1.40 U2.3 U2.10 U2.11 U2.21 U3.2 U4.2 U5.6 U5.16 | length 84.2
  Top Layer w0.25: SW8.A@21.8,15.25 21.8,13.75 v1(21.8,11.7) C15.A ; v1(28.2,56.25) DS1.2@30.35,56.25 ; SW5.A@30.8,6.25 30.8,4.75 v1(30.8,2.8) 30.825,2.775 32.475,2.775 C12.A ; SW6.A@30.8,15.25 30.8,13.75 v1(30.8,11.7) C13.A ; SW4.A@30.8,24.25 30.8,22.75 v1(30.8,20.8) C11.A ; SW7.A@40.8,15.25 40.8,13.75 v1(40.8,11.7) C14.A ; v1(41.9,2.4) R29.A ; U4.2 44.01,76.31 v1(44.7,77) ; v1(43.3,2.4) C22.A ; J1.A1 v1(46.8,8.9) ; v1@50.173,40.827 v1@50.221,40.779 ; R28.A@50.221,39.879 R28.A v1(50.3,40.827) ; R27.A 51.712,39.813 51.712,40.687 v1(51.725,40.7) ; SW1.A@51.8,90.25 51.8,88.75 v1(51.8,86.9) C4.A ; v1(53.1,37.3) R11.A ; J1.B1 v1(53.2,8.9) ; C6.A v1(57.1,51.8) ; v1(57.3,37.2) R14.B R14.B@57.312,38.287 ; v1(58.9,92.5) C3.A ; C1.A 59,97.9 v1(59.7,98.6) 59.757,98.543 59.757,98.443 60.3,97.9 C2.A ; v1(59.6,53.2) 59.6,52.9 60.1,52.4 C7.A ; C2.A@60.455,97.845 62.445,97.845 U1.1 ; C8.B v1(65.475,48.9) ; R13.B 64.313,38.3 64.536,38.077 64.536,37.764 v1(65,37.3) 65.051,37.3 65.5,37.749 65.5,38.1 R10.B ; v1(71.9,71.2) D1.B ; v1(72.5,35.35) C17.A@72.5,36.45 ; v1@74.8,35.4 C16.A@74.8,36.35 ; v1(76.1,37.3) 76.109,37.291 77.621,37.291 U5.16 ; U5.6 v1(84.882,37.918) ; v1(83.8,92.5) R19.A ; C20.A v1(86.8,38.487) ; Q1.1 88.583,97.037 88.583,97.983 v1(88.6,98) ; C5.B v1(92.9,77.9) 92.9,79.78 SW2.B@92.9,81.28 ; v4(92.5,3.1) C10.B ; C9.A 94.15,9.65 94.7,9.1 U3.2 ; v1(95.5,93.9) D2.B
  Top Layer w0.5: C21.A v1(54.9,10.8)
  Bottom Layer w0.25: B1.- v1(86.6,13)
  other v1: 94.2,9.6 74.8,35.35
  other v2: 30.695,29.061 29.636,29.181 95.656,29.187 96.7,29.4 96.7,29.4 31.622,29.586 94.686,29.628 28.85,29.9 28.85,29.9 97.419,30.186 32.063,30.556 94.161,30.555 28.637,30.944 97.539,31.245 31.85,31.6 94.281,31.614 29.078,31.914 97.014,32.172 31.064,32.319 95,32.4 30.005,32.439 96.044,32.613 95.656,67.337 30.695,67.361 29.636,67.481 96.7,67.55 96.7,67.55 94.686,67.778 31.622,67.886 28.85,68.2 97.419,68.336 94.161,68.705 32.063,68.856 28.637,69.244 97.539,69.395 94.281,69.764 31.85,69.9 31.85,69.9 29.078,70.214 97.014,70.322 95,70.55 31.064,70.619 30.005,70.739 96.044,70.763
  other v3: 59.5,45.4 60.5,45.4 61.5,45.4 59.5,46.4 60.5,46.4 61.5,46.4 59.5,47.4 60.5,47.4 61.5,47.4
NetC3_B: C3.B R1.B R2.B U1.3 | length 7.5
  Top Layer w0.25: R2.B R1.B C3.B U1.3
NetC4_B: C4.B R2.A SW1.B | length 6.8
  Top Layer w0.25: C4.B 55,88.75 55,90.25 R2.A
NetC5_A: C5.A R5.B SW2.A | length 8.3
  Top Layer w0.25: R5.B 89.7,81.28 89.7,79.78 C5.A
NetC9_B: C9.B SW3.4 U3.1 U3.3 | length 23.4
  Top Layer w0.25: U3.3 93.2,8 93.2,12.3 95.65,12.3 ; U3.1 C9.B 95.65,12.3 ; SW3.4 95.65,22.45 95.65,12.3
NetC11_B: C11.B R20.A SW4.B | length 5.1
  Top Layer w0.25: C11.B SW4.B@34,22.75 ; SW4.B@34,24.25 SW4.B@34,22.75 ; R20.A SW4.B@34,22.75
NetC12_B: C12.B R21.A SW5.B | length 5.2
  Top Layer w0.25: C12.B SW5.B@34,4.75 ; SW5.B@34,6.25 SW5.B@34,4.75 ; R21.A SW5.B@34,4.75
NetC13_B: C13.B R22.A SW6.B | length 5.3
  Top Layer w0.25: C13.B SW6.B@34,13.75 ; SW6.B@34,15.25 SW6.B@34,13.75 ; R22.A 35.7,13.75 SW6.B@34,13.75
NetC14_B: C14.B R23.A SW7.B | length 5.4
  Top Layer w0.25: C14.B SW7.B@44,13.75 ; SW7.B@44,15.25 SW7.B@44,13.75 ; R23.A SW7.B@44,13.75
NetC15_B: C15.B R24.A SW8.B | length 5.4
  Top Layer w0.25: C15.B SW8.B@25,13.75 ; SW8.B@25,15.25 SW8.B@25,13.75 ; R24.A 26.8,13.75 SW8.B@25,13.75
NetC20_B: C20.B U5.3 U5.13 U5.14 | length 10.9
  Top Layer w0.25: U5.13 U5.14 79.257,38.553 81.797,36.013 U5.3 83.376,36.006 86.794,36.006 C20.B
NetC22_B: C22.B J1.SHELL R29.B | length 9.8
  Top Layer w0.25: R29.B v1(41.9,6) ; C22.B v1(43.3,6) ; J1.SHELL@45.68,3.045 45.69,3.035 45.69,1.41 v1(45.7,1.4) ; J1.SHELL@45.68,7.225 45.68,5.42 v1@45.7,5.4 ; v1(54.3,1.4) 54.31,1.41 54.31,3.035 54.32,3.045 J1.SHELL@54.32,3.525 ; v1(54.3,5.42) 54.31,5.43 54.31,7.215 54.32,7.225 J1.SHELL@54.32,6.675
  other v1: 45.7,5.42
NetD1_A: D1.A R3.A | length 1.4
  Top Layer w0.25: R3.A 71.885,74 D1.A
NetD2_A: D2.A R4.B | length 44
  Top Layer w0.25: R4.B 97,75.35 D2.A
NetD3_B: D3.B R6.A | length 33.1
  Top Layer w0.25: D3.B v1(58.6,6.2)
  Bottom Layer w0.25: v1(58.6,6.2) v1(58.6,38.3)
NetD4_B: D4.B R8.A | length 33.1
  Top Layer w0.25: D4.B v1(60,6.2)
  Bottom Layer w0.25: v1(60,6.2) v1(60,38.3)
NetD5_B: D5.B R9.A | length 33
  Top Layer w0.25: D5.B v1(61.4,6.2)
  Bottom Layer w0.25: v1(61.4,6.2) v1(61.4,38.3)
NetDS1_3: DS1.3 U1.17 | length 47.5
  Top Layer w0.25: DS1.3 40.806,53.71 66.48,79.384 66.48,79.708 U1.17
NetDS1_4: DS1.4 U1.18 | length 49.9
  Top Layer w0.25: DS1.4 39.536,51.17 67.75,79.384 67.75,79.708 U1.18
NetDS1_5: DS1.5 U1.19 | length 52.2
  Top Layer w0.25: DS1.5 38.266,48.63 69.02,79.384 69.02,79.708 U1.19
NetDS1_6: DS1.6 U1.20 | length 54.5
  Top Layer w0.25: DS1.6 36.996,46.09 70.29,79.384 70.29,79.708 U1.20
NetDS1_7: DS1.7 U1.23 | length 59.2
  Top Layer w0.25: DS1.7 35.55,43.55 v1(63.4,71.4)
  Bottom Layer w0.25: v1(63.4,71.4) 72.033,80.033 v1(74.425,80.033)
NetDS1_8: DS1.8 U1.24 | length 61.5
  Top Layer w0.25: DS1.8 34.21,41.01 v1(63.9,70.7)
  Bottom Layer w0.25: v1(63.9,70.7) 72.6,79.4 75.062,79.4 v1(75.695,80.033)
NetJ1_A5: J1.A5 R28.B | length 31.1
  Top Layer w0.25: J1.A5 v1(48.75,10.2)
  Bottom Layer w0.25: v1(48.75,10.2) 48.75,13.101 50.3,14.651 v1(50.3,38.3)
NetJ1_B5: J1.B5 R27.B | length 30.7
  Top Layer w0.25: v1(51.5,10.2) 51.5,10.119 51.75,9.869 J1.B5
  Bottom Layer w0.25: v1(51.5,10.2) 51.5,38.1 v1(51.7,38.3)
NetQ1_2: Q1.2 U1.39 | length 8.6
  Top Layer w0.25: U1.39 Q1.2
NetQ1_3: Q1.3 R18.B | length 4.5
  Top Layer w0.25: R18.B 85.1,93.75 87.37,96.02 Q1.3
NetQ1_4: Q1.4 Q1.5 R17.B | length 2.7
  Top Layer w0.25: Q1.5 Q1.4 R17.B
NetR3_B: R3.B U1.21 | length 3.2
  Top Layer w0.25: R3.B U1.21
NetR4_A: R4.A U1.22 | length 3.2
  Top Layer w0.25: U1.22 73.177,80.011 73.177,76.873 R4.A
NetR5_A: R5.A U1.27 | length 3.3
  Top Layer w0.25: U1.27 R5.A
NetR6_B: R6.B U2.6 | length 4.9
  Top Layer w0.25: R6.B 58.6,41.7 59.5,42.6 U2.6
NetR7_A: R7.A R11.B U2.2 | length 9.1
  Top Layer w0.25: R7.A 54.5,43.49 57.887,46.877 58.427,46.877 U2.2
NetR8_B: R8.B U2.7 | length 4.5
  Top Layer w0.25: R8.B U2.7
NetR9_B: R9.B U2.8 | length 4.9
  Top Layer w0.25: U2.8 60.5,42.486 61.4,41.587 R9.B
NetR10_A: R10.A U2.13 | length 8.3
  Top Layer w0.25: U2.13 62.573,46.377 63.256,46.377 65.7,43.933 R10.A
NetR12_B: R12.B U2.4 | length 7.5
  Top Layer w0.25: R12.B 55.9,43.89 57.887,45.877 58.427,45.877 U2.4
NetR13_A: R13.A U2.12 | length 7.1
  Top Layer w0.25: U2.12 62.573,45.877 63.113,45.877 64.3,44.69 R13.A
NetR14_A: R14.A U2.5 | length 6.3
  Top Layer w0.25: R14.A 57.3,44.55 58.15,45.4 U2.5
NetR15_B: R15.B U2.9 | length 5.3
  Top Layer w0.25: U2.9 61,42.7 62.8,40.9 R15.B
NetR16_B: R16.B U2.17 | length 5.4
  Top Layer w0.25: U2.17 61.023,48.473 61.023,53.723 R16.B
NetR18_A: R18.A R19.B U1.38 | length 5
  Top Layer w0.25: U1.38 R19.B R18.A
NetR20_B: R20.B U1.5 | length 84.8
  Top Layer w0.25: R20.B 37.225,22.775 38.375,22.775 v1(38.4,22.8)
  Bottom Layer w0.25: v1(38.4,22.8) 43.8,22.8 44.1,23.1 44.1,75.2 61.61,92.71 v1(62.5,92.71)
NetR21_B: R21.B U1.8 | length 96.4
  Top Layer w0.25: R21.B 37.225,4.775 38.475,4.775 v1(38.5,4.8)
  Bottom Layer w0.25: v1(38.5,4.8) 38.525,4.825 39.125,4.825 46.362,12.062 46.362,73.962 61.3,88.9 v1(62.5,88.9)
NetR22_B: R22.B U1.7 | length 92.3
  Top Layer w0.25: R22.B v1(38.1,13.7)
  Bottom Layer w0.25: v1(38.1,13.7) 45.474,13.7 45.65,13.876 45.65,74.1 61.72,90.17 v1(62.5,90.17)
NetR23_B: R23.B U1.9 | length 82.5
  Top Layer w0.25: R23.B 47.325,13.775 48.575,13.775 v1(48.6,13.8)
  Bottom Layer w0.25: v1(48.6,13.8) 47.2,15.2 47.2,73.025 61.775,87.6 62.47,87.6 v1(62.5,87.63)
NetR24_B: R24.B U1.6 | length 97.3
  Top Layer w0.25: R24.B v1(29.2,13.7)
  Bottom Layer w0.25: v1(29.2,13.7) 36.299,13.7 44.875,22.276 44.875,74.975 61.34,91.44 v1(62.5,91.44)
NetR25_B: R25.B U5.12
NetR26_B: R26.B U5.11
NetU1_11: U1.11 U4.4 | length 21.4
  Top Layer w0.25: U4.4 46.3,85.09 U1.11
NetU1_12: U1.12 U4.3 | length 22
  Top Layer w0.25: U4.3 47.57,83.82 U1.12
NetU1_36: U1.36 U5.20 | length 59.2
  Top Layer w0.25: v1(77.6,34.699) 77.6,34.8 77.63,34.77 U5.20
  Bottom Layer w0.25: v1(77.6,34.699) 77.6,90.31 v1(80,92.71)
NetU1_37: U1.37 U5.4 | length 59.2
  Top Layer w0.25: v1(82.577,36.648) U5.4
  Bottom Layer w0.25: v1(80,93.98) 82.577,91.403 v1(82.577,36.648)
V_Bat: B1.+ C8.A Q1.6 R17.A U2.14 U2.15 U2.16 | length 15.1
  Top Layer w0.25: U2.16@61.523,48.25 61.5,48.273 U2.16 62.075,48.45 62.55,47.975 U2.15 ; U2.14 U2.15 ; v1(65.475,47.4) C8.A U2.15 ; Q1.6 v1(89.835,94.465) 90.89,95.52 R17.A
  Bottom Layer w0.6: B1.+ v1(76.6,13)
V_Charger: C6.B SW3.5 U2.1 U2.20 | length 5.3
  Top Layer w0.25: U2.1 57.1,47.4 C6.B 59.5,48.7 U2.20
VBUS: C7.B C16.B C17.B D3.A D4.A D5.A FB1.B R7.B R12.A R15.A R16.A U2.18 U2.19 U5.15 | length 26
  Top Layer w0.25: v1(54.5,37.2) R7.B ; v1(55.9,5.2) D3.A D3.A@57.15,5.2 ; v1(55.9,37.2) R12.A ; v1(60,2.1) D4.A ; U2.19 60.023,48.473 60.023,50.723 C7.B@60.15,50.85 ; U2.18 60.5,50.677 60.277,50.9 C7.B 60.1,50.9 58.3,52.7 v1(58.3,54.1) 59.8,54.1 61,55.3 R16.A ; D5.A@62.8,5.3 v1(64.05,5.3) ; v1(62.8,37.2) R15.A ; C17.B C16.B ; C16.B@74.8,37.909 77.621,37.909 U5.15
  Top Layer w0.5: FB1.B v1(52.4,15.4)
VUSB: C21.B FB1.A J1.A4 J1.B4 | length 11.4
  Top Layer w0.5: J1.A4 v1(47.6,9.3) ; J1.B4 v1(52.4,9.3) C21.B FB1.A
  Int2 (PWR) w0.5: v1(47.6,9.3) v1(52.4,9.3)
pads on no net: J1.36 J1.A8 J1.B8 SW3.1 SW3.2 SW3.3 SW3.6 U1.4 U1.10 U1.13 U1.14 U1.15 U1.16 U1.25 U1.26 U1.28 U1.29 U1.30 U1.31 U1.32 U1.33 U1.34 U1.35 U3.4 U4.5 U4.6 U4.7 U4.8 U4.9 U4.10 U5.1 U5.2 U5.5 U5.7 U5.8 U5.9 U5.10 U5.17 U5.18 U5.19

## Polygon pours and split planes (outlines as drawn)
VBUS on Int2 (PWR) "VBUS_L03_P009" (solid, pour order 9): 19,55.1 19,0.7 66.1,0.7 66.1,38.66 ccw(c63.56,38.66) 63.56,41.2 61.4,41.2 61.4,52.56 ccw(c58.86,52.56) 58.86,55.1
V_Bat on Int2 (PWR) "V_BAT_L03_P007" (solid, pour order 7): 72,98.8 cw(c72.241,98.559) 72.241,98.9 99.2,98.9 99.2,0.924 cw(c98.176,0.924) 98.9,0.2 ccw(c98.417,-0.283) 98.417,0.4 67,0.4 67,39.948 ccw(c64.46,39.948) 66.256,41.744 63.644,44.356 ccw(c61.848,42.56) 61.596,45.087 61.852,53.785 cw(c64.241,53.715) 64.091,56.1 71.8,56.1 ccw(c71.8,56.5) 72.2,56.5 72.2,98.9
+3V3 on Int2 (PWR) "+3V3_L03_P006" (solid, pour order 6): 18.7,98.8 18.7,56.5 71.3,56.5 71.3,98.8
NetC22_B on Int2 (PWR) "NETC22_B_L03_P004" (solid, pour order 4): 41.4,6.6 41.4,0.9 55.026,0.9 55.026,6.675
GND on Int1 (GND) "GND_L02_P005" (solid, pour order 5): 0.3,0.9 99.1,0.9 99.1,99.1 0.3,99.1

## Silkscreen, mask and mechanical layers (free items; w line width, h text height)
Top Overlay:
  text "Power" at 93.254,96.554 h1.52
  text "Reset" at 50.754,91.854 h1.52
  text "Boot" at 89.054,83.254 h1.52
  text "Scan" at 65.954,72.154 h1.52
  text "ON" at 93.154,26.154 h1.52
  text "OFF" at 92.554,12.654 h1.52